# Altium PCB PCB1.PcbDoc (part 1 of 2)
Units mil, origin at the board's own origin, x right, y up, seen from the top; angles counter-clockwise.
Board outline 6000 x 4000 mil, 2 copper layers (Top Layer, Bottom Layer); 64 components, 67 nets, 213 pads, 0 vias.
Unrouted connection lines stored in the file: 121.
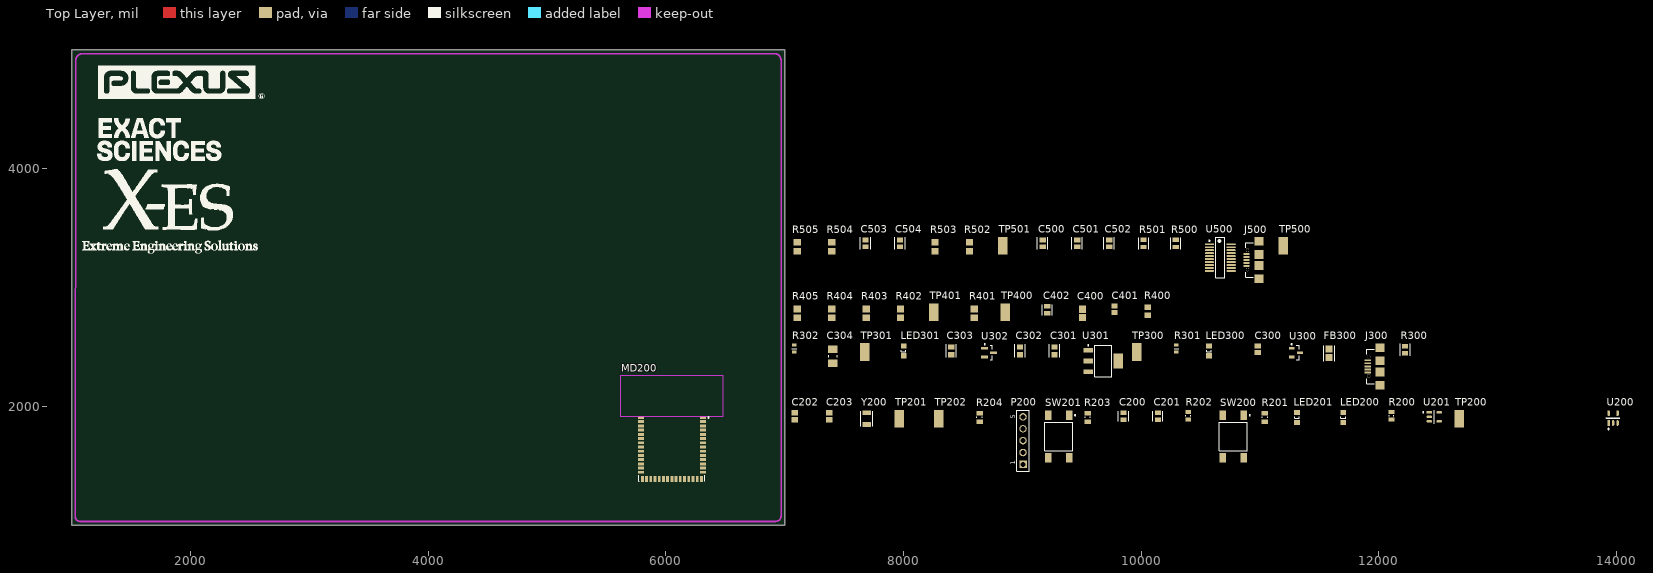
[diagram p0: Top Layer view]
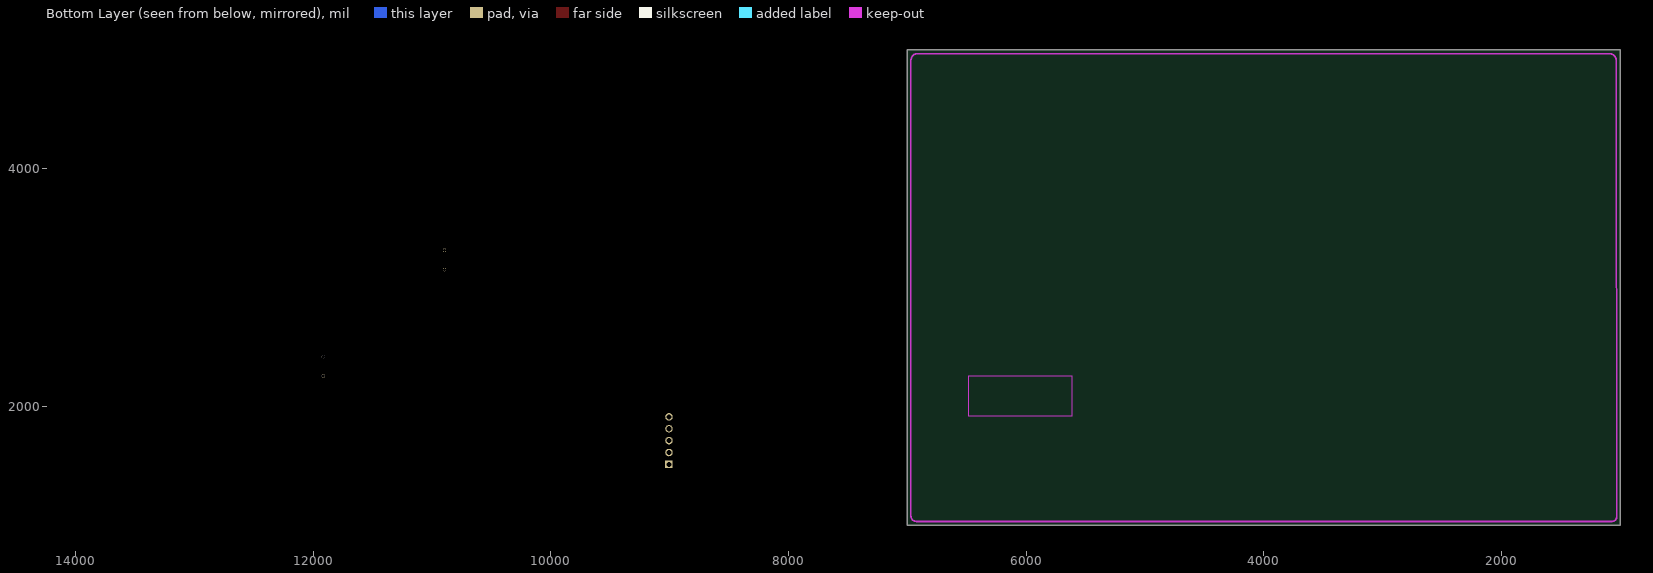
[diagram p1: Bottom Layer view, seen from below]

## Layer stack, top to bottom
Top Solder: solder mask 0.4, Solder Resist, Dk 3.5
Top Layer: signal copper 1.4
Dielectric 1: dielectric 12.6, FR-4, Dk 4.8
Bottom Layer: signal copper 1.4
Bottom Solder: solder mask 0.4, Solder Resist, Dk 3.5

## Board outline
1000,1000 7000,1000 7000,5000 1000,5000

## Design rules (kind name [scope] priority, off if disabled: settings)
Clearance [All] p1: gap=10 ignorepadtopadclearanceinfootprint=FALSE except(0: Arc-Hole Track-Hole SMDPad-Hole THPad-Hole Via-Hole Fill-Hole Poly-Hole Region-Hole Text-Hole)
PolygonConnect [All] p1: connectstyle=Relief reliefconductorwidth=10 reliefentries=4 polygonreliefangle="90 Angle" airgapwidth=10
RoomDefinition 05-UARTBridge [InComponentClass('05-UARTBridge')] p1: confinementstyle=ConfineIn formatcopy=TRUE lockcomponents=FALSE outline 7045,3025 11460,3025 11460,3535 7045,3535
RoomDefinition 04-Accel [InComponentClass('04-Accel')] p2: confinementstyle=ConfineIn formatcopy=TRUE lockcomponents=FALSE outline 7045,2685 10260,2685 10260,2975 7045,2975
RoomDefinition 03-Power [InComponentClass('03-Power')] p3: confinementstyle=ConfineIn formatcopy=TRUE lockcomponents=FALSE outline 7045,2130 12420,2130 12420,2640 7045,2640
RoutingVias [All] p1: holewidth=28 width=50 viastyle="Through Hole" minholewidth=28 minwidth=50 maxholewidth=28 maxwidth=50
SolderMaskExpansion [All] p1: expansion=4 istentingtop=FALSE
Width [All] p1: maxlimit=10 minlimit=10 preferedwidth=10
30 further rules are at their usual default settings.

## Classes and differential pairs
component class 05-UARTBridge: C500 C501 C502 C503 C504 J500 R500 R501 R502 R503 R504 R505 TP500 TP501 U500
component class 04-Accel: C400 C401 C402 C403 D400 R400 R401 R402 R403 R404 R405 TP400 TP401 U400
component class 03-Power: C300 C301 C302 C303 C304 FB300 J300 LED300 LED301 R300 R301 R302 TP300 TP301 U300 U301 U302

## Components (designator, comment, footprint, x,y, rotation, side; value= is the part's Value field where it differs from the comment)
C200 "C0805C106K8PACTU" FP-C0805C-DG-MFG 9850,1915 r90 top value=10uF
C201 "C0805C104K5RACTU" FP-C0805C-DN-MFG 10140,1915 r90 top value="0.10 μF"
C202 "08055A6R0CAT2A" CAPC2013X94X50LL20T25 7085,1915 r90 top
C203 "08055A6R0CAT2A" CAPC2013X94X50LL20T25 7375,1915 r90 top
C300 "0.01uF" CAPC2013X88X50LL20T25 10980,2480 r90 top
C301 "10uF" FP-GRM21B-0_1-IPC_B 9270,2465 r90 top
C302 "10uF" FP-GRM21B-0_1-IPC_B 8980,2465 r90 top
C303 "10uF" FP-GRM21B-0_1-IPC_B 8400,2465 r90 top
C304 "100uF" CAPC3216X190X55ML30T25 7405,2420 r90 top
C400 "2.2uF" CAPC2013X145X50ML20T25 9505,2780 r90 top
C401 "0.1uF" CAPC2013X145X50LL20T25 9775,2815 r90 top
C402 "10uF" FP-C0805C-DN-MFG 9210,2810 r90 top value="10,000 pF"
C500 "0.1uF" FP-CL21-IPC_C 9170,3370 r90 top
C501 "0.1uF" FP-CL21-IPC_C 9460,3370 r90 top
C502 "0.1uF" FP-CL21-IPC_C 9730,3370 r90 top
C503 "0.1uF" FP-CL21-IPC_C 7680,3370 r90 top
C504 "0.1uF" FP-CL21-IPC_C 7970,3370 r90 top
FB300 "BLM21AG121SN1D" FP-BLM21-0_2-t0_85-e0_5-IPC_A 11580,2445 r90 top
J300 "629105136821" 629105136821 12010,2335 r90 top
J500 "629105136821" 629105136821 10990,3230 r90 top
LED200 "150080RS75000" 0805_A 11700,1905 r90 top
LED201 "150080GS75000" 0805_A 11310,1905 r90 top
LED300 "150080GS75000" 0805_A 10570,2465 r90 top
LED301 "150080GS75000" 0805_A 8000,2465 r90 top
MD200 "CYBLE-416045-02" FP-CYBLE-416045-02-MFG 6050.59,1734.92 r0 top
P200 "61300511121" 61300511121 9005,1710 r90 top
R200 "RC0805FR-07330RL" RESC2013X60X35LL10T20 12105,1920 r90 top
R201 "RC0805FR-0710KL" RESC2013X60X35NL10T20 11040,1905 r90 top
R202 "RC0805FR-07330RL" RESC2013X60X35LL10T20 10395,1920 r90 top
R203 "RC0805FR-0710KL" RESC2013X60X35NL10T20 9550,1905 r90 top
R204 "RC0805FR-0710KL" RESC2013X60X35NL10T20 8640,1905 r90 top
R300 "1k" FP-ERA6A-IPC_C 12220,2475 r90 top
R301 "330R" FP-ERA3A-MFG 10295,2485 r90 top
R302 "330R" FP-ERA3A-MFG 7080,2485 r90 top
R400 "110R" RESC2013X60X40NL20T25 10055,2800 r90 top
R401 "100R" RESC2013X60X40ML20T25 8595,2780 r90 top
R402 "100R" RESC2013X60X40ML20T25 7975,2780 r90 top
R403 "100R" RESC2013X60X40ML20T25 7685,2780 r90 top
R404 "100R" RESC2013X60X40ML20T25 7395,2780 r90 top
R405 "100R" RESC2013X60X40ML20T25 7105,2780 r90 top
R500 "27R" FP-CRGCQ0805-IPC_C 10290,3370 r90 top value=27Ω
R501 "27R" FP-CRGCQ0805-IPC_C 10020,3370 r90 top value=27Ω
R502 "100R" RESC2013X60X40ML20T25 8555,3340 r90 top
R503 "100R" RESC2013X60X40ML20T25 8265,3340 r90 top
R504 "100R" RESC2013X60X40ML20T25 7395,3340 r90 top
R505 "100R" RESC2013X60X40ML20T25 7105,3340 r90 top
SW200 "FSM4JSMA" TECO-FSM4JSMA_V 10775,1745 r0 top
SW201 "FSM4JSMA" TECO-FSM4JSMA_V 9305,1745 r0 top
TP200 "5019" KSTN-5019_V 12675,1895 r90 top
TP201 "5019" KSTN-5019_V 7965,1895 r90 top
TP202 "5019" KSTN-5019_V 8295,1895 r90 top
TP300 "5019" KSTN-5019_V 9960,2455 r90 top
TP301 "5019" KSTN-5019_V 7675,2455 r90 top
TP400 "5019" KSTN-5019_V 8855,2790 r90 top
TP401 "5019" KSTN-5019_V 8255,2790 r90 top
TP500 "5019" KSTN-5019_V 11195,3350 r90 top
TP501 "5019" KSTN-5019_V 8835,3350 r90 top
U200 "SN74AHC1G08DBV3" FP-DBV0005A-IPC_C 13970,1900 r90 top
U201 "SN74AHC1G08DBV3" FP-DBV0005A-IPC_C 12465,1910 r0 top
U300 "MCP112T-300E/TT" SOT-23-TT3_L 11300,2450 r0 top
U301 "TLV1117LV33DCYT" DCY0004A_M 9680,2380 r0 top
U302 "MCP809T-450I/TT" SOT-23-TT3_N 8720,2450 r0 top
U500 "FT231XS-U" SSOP-20_L 10665,3250 r0 top
Y200 "32.768KHZ" FP-ABS07-120-MFG 7690,1895 r90 top

## Footprints (in the part's own frame and the unit in brackets; to place one, negate y for a bottom-side part, rotate by r counter-clockwise, add the part's x,y. Pads: shape width x height; smd on the part's side, far side on the other; paste and mask are expansions set on the pad)
0805_A [mm] "Chip LED, 2-Leads, Body 2.0x1.3mm, IPC Medium Density"
  rect 1.1x1.2 smd: 1(-1.05,0) 2(1.05,0)
  silkscreen extent -0.15,-0.5 0.15,0.5, body extent -1,-0.62 1,0.63, height 0.68
61300511121 [mm] "Pin Header, pitch 2.54 mm, THT, Vertical, single row, 5p"
  rect 1.6x1.6 hole 1.1: 1(-5.08,0)
  round 1.6 hole 1.1: 2(-2.54,0) 3(0,0) 4(2.54,0) 5(5.08,0)
  silkscreen extent -6.5,-1.35 6.5,1.35, body extent -6.35,-1.27 6.35,1.27, height 8.57
629105136821 [mm] "Micro USB 2.0 SMT Type B Horizontal 5 Contacts"
  rect 0.4x1.35 smd: 1(-1.3,2.675) 2(-0.65,2.675) 3(0,2.675) 4(0.65,2.675) 5(1.3,2.675)
  round 0.7 hole 0.7 unplated: MH1(-2.075,2.45) MH2(2.075,2.45)
  rect 1.8x1.9 smd: Shell(-4,0) Shell(4,0)
  rect 1.9x1.9 smd: Shell(-1.2,0) Shell(1.2,0)
  silkscreen extent -3.7,1.25 3.7,2.85, body extent -4,-2.73 4,3.17, height 2.69
CAPC2013X88X50LL20T25 [mm] "Chip Capacitor, 2-Leads, Body 2.00x1.25mm, IPC High Density"
  rect 1.1x1.35 smd: 1(-0.7,0) 2(0.7,0)
  body extent -1.1,-0.72 1.1,0.72, height 0.88
CAPC2013X94X50LL20T25 [mm] "Chip Capacitor, 2-Leads, Body 2.01x1.25mm, IPC High Density"
  rect 1.15x1.35 smd: 1(-0.725,0) 2(0.725,0)
  body extent -1.1,-0.72 1.1,0.72, height 0.94
CAPC2013X145X50LL20T25 [mm] "Chip Capacitor, 2-Leads, Body 2.00x1.25mm, IPC High Density"
  rect 1.1x1.35 smd: 1(-0.7,0) 2(0.7,0)
  body extent -1.1,-0.72 1.1,0.72, height 1.45
CAPC2013X145X50ML20T25 [mm] "Chip Capacitor, 2-Leads, Body 2.00x1.25mm, IPC Low Density"
  rect 1.5x1.55 smd: 1(-0.9,0) 2(0.9,0)
  body extent -1.1,-0.72 1.1,0.72, height 1.45
CAPC3216X190X55ML30T25 [mm] "Chip Capacitor, 2-Leads, Body 3.5x1.9mm, IPC Low Density"
  rect 1.65x2 smd: 1(-1.475,0) 2(1.475,0)
  silkscreen extent -0.25,-0.9 0.25,0.9, body extent -1.75,-0.95 1.75,0.95, height 1.9
DCY0004A_M [mm] "SOT223, 4-Leads, Body 6.7x3.7mm, Pitch 2.3mm, IPC Low Density"
  rrect10% 2.05x1 smd: 1(-3.175,2.3) 2(-3.175,0) 3(-3.175,-2.3)
  rrect5% 2.05x3.25 smd: 4(3.175,0)
  silkscreen extent -3.3,-3.35 1.85,3.47, body extent -3.5,-3.25 3.5,3.25, height 1.62
FP-ABS07-120-MFG [mm]
  rect 1x1.8 smd paste+0 mask+0: 1(-1.25,0) 2(1.25,0)
  silkscreen extent -1.6,-1.3 1.6,1.3, body extent -1.85,-1 1.85,1, height 0.25
FP-BLM21-0_2-t0_85-e0_5-IPC_A [mil]
  rect 57.28x61.27 smd paste+0 mask+0: 1(-36.44,0) 2(36.44,0)
  silkscreen extent -65,-46 65,46, body extent -85,-50 85,50, height 10
FP-C0805C-DG-MFG [mm]
  rect 0.95x1.35 smd paste+0 mask+0: 1(-0.75,0) 2(0.75,0)
  silkscreen extent -1.11,-1.08 1.1,1.07, body extent -1.4,-0.85 1.4,0.85, height 0.25
FP-C0805C-DN-MFG [mm]
  rect 0.95x1.35 smd paste+0 mask+0: 1(-0.75,0) 2(0.75,0)
  silkscreen extent -1.1,-1.07 1.1,1.07, body extent -1.4,-0.85 1.4,0.85, height 0.25
FP-CL21-IPC_C [mil]
  rect 41.52x53.39 smd paste+0 mask+0: 1(-28.57,0) 2(28.57,0)
  silkscreen extent -49,-44 49,44, body extent -53,-32 53,32, height 10
FP-CRGCQ0805-IPC_C [mil]
  rect 35.67x51.57 smd paste+0 mask+0: 1(-30.55,0) 2(30.55,0)
  silkscreen extent -48,-43 48,43, body extent -52,-31 52,31, height 10
FP-CYBLE-416045-02-MFG [mm]
  rect 1.27x0.61 smd paste+0 mask+0: 1(6.619,4.32) 2(6.619,3.42) 3(6.619,2.52) 4(6.619,1.62) 5(6.619,0.71) 6(6.619,-0.19) 7(6.619,-1.09) 8(6.619,-1.99) 9(6.619,-2.89) 10(6.619,-3.79) 11(6.619,-4.7) 12(6.619,-5.6) 13(6.619,-6.5) 14(6.619,-7.4) 30(-6.619,-7.4) 31(-6.619,-6.5) 32(-6.619,-5.6) 33(-6.619,-4.7) 34(-6.619,-3.79) 35(-6.619,-2.89) 36(-6.619,-1.99) 37(-6.619,-1.09) 38(-6.619,-0.19) 39(-6.619,0.71) 40(-6.619,1.62) 41(-6.619,2.52) 42(-6.619,3.42) 43(-6.619,4.32)
  rect 0.61x1.27 smd paste+0 mask+0: 15(6.31,-8.869) 16(5.41,-8.869) 17(4.51,-8.869) 18(3.61,-8.869) 19(2.71,-8.869) 20(1.8,-8.869) 21(0.9,-8.869) 22(0,-8.869) 23(-0.9,-8.869) 24(-1.8,-8.869) 25(-2.7,-8.869) 26(-3.61,-8.869) 27(-4.51,-8.869) 28(-5.41,-8.869) 29(-6.31,-8.869)
  Keep-Out Layer region: -11,4.63 11,4.63 11,13.25 -11,13.25
  Keep-Out Layer region: -11,4.63 11,4.63 11,13.25 -11,13.25
  silkscreen extent -7.07,-9.33 7.95,4.43, body extent -11,-9.6 11,13.25, height 0.25
FP-DBV0005A-IPC_C [mm]
  rect 1.205x0.532 smd paste+0 mask+0: 1(-1.05,0.95)
  rrect100% 1.205x0.532 smd paste+0 mask+0: 2(-1.05,0) 3(-1.05,-0.95) 4(1.05,-0.95) 5(1.05,0.95)
  silkscreen extent -2.45,-1.45 0.05,1.45, body extent -1.75,-1.55 1.75,1.55, height 0.25
FP-ERA3A-MFG [mm]
  rect 0.65x0.9 smd paste+0 mask+0: 1(-0.725,0) 2(0.725,0)
  silkscreen extent 0,-0.5 0,0.5, body extent -1.15,-0.6 1.15,0.6, height 0.25
FP-ERA6A-IPC_C [mil]
  rect 39.55x49.69 smd paste+0 mask+0: 1(-29.56,0) 2(29.56,0)
  silkscreen extent -49,-42 49,42, body extent -53,-31 53,31, height 10
FP-GRM21B-0_1-IPC_B [mil]
  rect 45.58x53.63 smd paste+0 mask+0: 1(-32.57,0) 2(32.57,0)
  silkscreen extent -55,-43 55,43, body extent -65,-37 65,37, height 10
KSTN-5019_V [mm] "Test Point, 1-Leads, Body 3.81x2.03mm"
  rect 3.8x2.03 smd: 1(0,0)
  body extent -1.9,-1.01 1.9,1.02, height 2.29
RESC2013X60X35LL10T20 [mm] "Chip Resistor, 2-Leads, Body 2.1x1.35mm, IPC High Density"
  rect 0.8x1.25 smd: 1(-0.8,0) 2(0.8,0)
  silkscreen extent -0.1,-0.53 0.1,0.53, body extent -1.05,-0.67 1.05,0.68, height 0.6
RESC2013X60X35NL10T20 [mm] "Chip Resistor, 2-Leads, Body 2.1x1.35mm, IPC Medium Density"
  rect 1x1.35 smd: 1(-0.9,0) 2(0.9,0)
  silkscreen extent -0.1,-0.58 0.1,0.58, body extent -1.05,-0.68 1.05,0.67, height 0.6
RESC2013X60X40ML20T25 [mm] "Chip Resistor, 2-Leads, Body 2.00x1.25mm, IPC Low Density"
  rect 1.4x1.55 smd: 1(-0.95,0) 2(0.95,0)
  body extent -1.1,-0.72 1.1,0.72, height 0.6
RESC2013X60X40NL20T25 [mm] "Chip Resistor, 2-Leads, Body 2.00x1.25mm, IPC Medium Density"
  rect 1.2x1.45 smd: 1(-0.85,0) 2(0.85,0)
  body extent -1.1,-0.72 1.1,0.72, height 0.6
SOT-23-TT3_L [mm] "SOT23, 3-Leads, Body 2.9x1.3mm, Pitch 0.95mm, Lead Span 2.4mm, IPC High Density"
  rect 1.2x0.6 smd: 1(-0.9,0.95) 2(-0.9,-0.95) 3(0.9,0)
  silkscreen extent -1.02,-1.55 0.7,1.92, body extent -0.7,-1.52 0.7,1.53, height 1.12
SOT-23-TT3_N [mm] "SOT23, 3-Leads, Body 2.9x1.3mm, Pitch 0.95mm, Lead Span 2.4mm, IPC Medium Density"
  rect 1.5x0.6 smd: 1(-0.95,0.95) 2(-0.95,-0.95) 3(0.95,0)
  silkscreen extent -1.07,-1.55 0.7,1.92, body extent -0.7,-1.52 0.7,1.53, height 1.12
SSOP-20_L [mm] "SOP, 20-Leads, Body 8.6x3.9mm, Pitch 0.635mm, IPC High Density"
  oval 1.95x0.4 smd: 1(-2.325,2.857) 2(-2.325,2.222) 3(-2.325,1.587) 4(-2.325,0.953) 5(-2.325,0.318) 6(-2.325,-0.318) 7(-2.325,-0.953) 8(-2.325,-1.587) 9(-2.325,-2.222) 10(-2.325,-2.857) 11(2.325,-2.857) 12(2.325,-2.222) 13(2.325,-1.587) 14(2.325,-0.953) 15(2.325,-0.318) 16(2.325,0.318) 17(2.325,0.953) 18(2.325,1.587) 19(2.325,2.222) 20(2.325,2.857)
  silkscreen extent -2.45,-4.35 1,4.35, body extent -1.99,-4.37 1.99,4.37, height 1.76
TECO-FSM4JSMA_V [mm] "SMD, 4-Leads, Body 6x6mm, Pitch 4.5mm"
  rect 1.4x2.1 smd: 1(2.25,4.55) 2(2.25,-4.55) 3(-2.25,4.55) 4(-2.25,-4.55)
  silkscreen extent -3,-3 3.63,4.67, body extent -3,-5 3,5, height 5.08

## Part data
C200: library part CMP-2007-03243-2, "CAP CER 10UF 10V X5R 0805", 3DS Part Number=220-00001, Capacitance=10uF, Case Code (Imperial)=0805, Case Code (Metric)=2012, Dielectric=X5R, Dielectric Material=Ceramic, Manufacturer=Kemet, Manufacturer 1=KEMET, Max Operating Temperature=85°C, Min Operating Temperature=-55°C, Package=C0805C-DG, Package Quantity=1, Supplier Part Number 1=399-C0805C106K8PAC7800CT-ND, Temperature="-55°C to +85°C", Temperature Coefficient=15%, Temperature Range High=+85°C, Tolerance=10%, Voltage=10V, Automotive=No, Case/Package=0805, Category=Cap, ComponentLink2Description=Datasheet, ComponentLink2URL=https://content.kemet.com/datasheets/KEM_C1006_X5R_SMD.pdf, Construction=Flat, Contact Plating=Tin,Matte, Depth=1.25mm, Device Class L1="Passive Components", Device Class L2=Capacitors, Device Class L3="Ceramic Capacitors", Digikey Description="CAP CER 10UF 10V X5R 0805", Dissipation Factor=10%, Height=1.4mm, Ipc Land Pattern Name=CAPC200125X125, Lead Free=Yes, Length=2mm, Manufacturer Part Number=C0805C106K8PACTU, Manufacturer Part Number 1=C0805C106K8PACTU, Material=Ceramic, Mount="Surface Mount", Mouser Description="CAP CER 10UF 10V X5R 0805", Number of Pins=2, Octopart=https://octopart.com/c0805c106k8pactu-kemet-98697, Packaging="Tape and Reel", Pricing 1="1=0.14000, 10=0.10300, 50=0.05840, 100=0.04830, 500=0.03388, 1000=0.02805 (USD)", Radiation Hardening=No, REACH SVHC="No SVHC", RoHS=TRUE, RoHS Compliant=Yes, Series=C, Stock 1=8631846, Supplier 1=Digi-Key, Temperature Characteristic=X5R, Temperature Range Low=-55°C, Termination=SMD/SMT, Thickness=0.055inch, Voltage Rating=10V, Voltage Rating (DC)=10V, Width=1.2mm
C201: library part CMP-2007-00279-2, "CAP CER 0.1UF 50V X7R 0805", Capacitance="0.10 μF", Case Code (Imperial)=0805, Case Code (Metric)=2012, Dielectric=X7R, Dielectric Material=Ceramic, Manufacturer=KEMET, Max Operating Temperature=125°C, Min Operating Temperature=-55°C, Package=C0805C-DN, Package Quantity=4000, Supplier Part Number 1=399-C0805C104K5RAC7800CT-ND, Temperature="-55°C to +125°C", Temperature Coefficient=30ppm/°C, Temperature Range High=+125°C, Tolerance=0.1, Voltage=500V, Voltage Rating="50 V", Voltage Rating (DC)=50V, Automotive=No, Case/Package=0805, Category=Cap, ComponentLink2Description=Datasheet, ComponentLink2URL=https://content.kemet.com/datasheets/KEM_C1003_C0G_SMD.pdf, Construction=Flat, Contact Plating=Tin,Matte, Depth=1.25mm, Device Class L1="Passive Components", Device Class L2=Capacitors, Device Class L3="Ceramic Capacitors", Digikey Description="CAP CER 0.1UF 50V X7R 0805", Height=0.88mm, Ipc Land Pattern Name=CAPC200125X78, Lead Free=Yes, Lead Pitch=0.75mm, Length=2mm, Manufacturer 1=KEMET, Manufacturer Part Number=C0805C104K5RACTU, Manufacturer Part Number 1=C0805C104K5RACTU, Material=Ceramic, Mount="Surface Mount,PCB", Mouser Description="Cap Ceramic 0.1uF 50V X7R 10% SMD 2.0 x 1.2 mm 125 C Paper T/R", Number of Pins=2, Octopart=https://octopart.com/c0805c104k5ractu-kemet-143926, Packaging="Tape and Reel", Pricing 1="1=0.14000, 10=0.09700, 50=0.05480, 100=0.04540, 500=0.03182, 1000=0.02634 (USD)", Radiation Hardening=No, REACH SVHC="No SVHC", RoHS=TRUE, RoHS Compliant=Yes, Series=C0805C, Stock 1=2903712, Supplier 1=Digi-Key, Temperature Characteristic=X7R, Temperature Range Low=-55°C, Termination=SMD/SMT, Thickness=0.035inch, Width=1.2mm
C202 C203: library part CMP-2007-04344-1, Capacitance=6pF, Case Code (Imperial)=0805, Case Code (Metric)=2012, Dielectric=C0G, Manufacturer="AVX Interconnect / Elco", Manufacturer 1="Kyocera AVX", Max Operating Temperature=125°C, Min Operating Temperature=-55°C, Package Quantity=4000, Supplier Part Number 1=478-11894-1-ND, Voltage Rating=50V, Case/Package=0805, Category="Ceramic Capacitors", ComponentLink1Description=https://datasheet.ciiva.com/205/ccog-205395.pdf?src-supplier=Digi-Key, ComponentLink1URL=https://datasheet.ciiva.com/205/ccog-205395.pdf?src-supplier=Digi-Key, ComponentLink2Description=https://datasheet.ciiva.com/11499/ccog-11499893.pdf?src-supplier=Avnet, ComponentLink2URL=https://datasheet.ciiva.com/11499/ccog-11499893.pdf?src-supplier=Avnet, ComponentLink3Description=https://datasheet.ciiva.com/5424/ccog-5424575.pdf?src-supplier=Mouser, ComponentLink3URL=https://datasheet.ciiva.com/5424/ccog-5424575.pdf?src-supplier=Mouser, Construction=Flat, Depth=1.25mm, Length=2.01mm, Manufacturer Part Number 1=08055A6R0CAT2A, Mount="Surface Mount", Packaging="Tape and Reel", Part Number=08055A6R0CAT2A, Pricing 1="1=0.24000, 10=0.16700, 50=0.10000, 100=0.08440, 500=0.05778, 1000=0.05111 (USD)", Radiation Hardening=No, RoHS=Yes, RoHS Compliant=Yes, Series=-, Stock 1=19844, Supplier 1=Digi-Key, Termination=SMD/SMT, Thickness=0.037inch, Voltage Rating (DC)=50V, Width=0.049inch
C300: library part CMP-2007-00266-1, Capacitance=10nF, Case Code (Imperial)=0805, Case Code (Metric)=2012, Dielectric=X7R, Manufacturer=Kemet, Manufacturer Part Number=C0805C103K5RACTU, Max Operating Temperature=125°C, Min Operating Temperature=-55°C, Package Quantity=4000, Tolerance=10%, Voltage=50V, Case/Package=0805, Category="Ceramic Capacitors", ComponentLink1Description=http://www.farnell.com/datasheets/2740682.pdf?src-supplier=Farnell, ComponentLink1URL=http://www.farnell.com/datasheets/2740682.pdf?src-supplier=Farnell, ComponentLink2Description=http://www.onlinecomponents.com/productFiles/mf-KEM/kem_c1002_x7r_smd.pdf?src-supplier=Onlinecomponents.com, ComponentLink2URL=http://www.onlinecomponents.com/productFiles/mf-KEM/kem_c1002_x7r_smd.pdf?src-supplier=Onlinecomponents.com, ComponentLink3Description=https://www.verical.com/server-webapp/html/getDatasheet?partID=293414&src-supplier=Verical, ComponentLink3URL=https://www.verical.com/server-webapp/html/getDatasheet?partID=293414&src-supplier=Verical, ComponentLink4Description=http://www.farnell.com/datasheets/2740682.pdf?src-supplier=Newark, ComponentLink4URL=http://www.farnell.com/datasheets/2740682.pdf?src-supplier=Newark, ComponentLink5Description=http://www.farnell.com/datasheets/2740682.pdf?src-supplier=Element14, ComponentLink5URL=http://www.farnell.com/datasheets/2740682.pdf?src-supplier=Element14, ComponentLink6Description=https://api.kemet.com/component-edge/download/datasheet/C0805C103K5RACTU.pdf?src-supplier=Digi-Key, ComponentLink6URL=https://api.kemet.com/component-edge/download/datasheet/C0805C103K5RACTU.pdf?src-supplier=Digi-Key, ComponentLink7Description=http://www.kemet.com/Lists/ProductCatalog/Attachments/53/KEM_C1002_X7R_SMD.pdf?src-supplier=Avnet, ComponentLink7URL=http://www.kemet.com/Lists/ProductCatalog/Attachments/53/KEM_C1002_X7R_SMD.pdf?src-supplier=Avnet, Construction=Flat, Contact Plating=Tin,Matte, Depth=1.25mm, Height=0.78mm, Lead Pitch=0.75mm, Length=2mm, Mount="Surface Mount", Packaging="Tape and Reel", Part Number=C0805C103K5RACTU, Pricing 2="1=0.11000, 10=0.07500, 50=0.04260, 100=0.03530, 500=0.02476, 1000=0.02050 (USD)", Radiation Hardening=No, RoHS=Yes, Stock 2=3220156, Supplier 1=Digi-Key, Supplier 2=Digi-Key, Termination=SMD/SMT, Voltage Rating=50V, Voltage Rating (DC)=50V, Width=1.2mm
C301 C302 C303: library part CMP-2007-03503-2, "Chip Multilayer Ceramic Capacitors for General Purpose, 0805, 10uF, X6S, 22%, 10%, 16V", Case Code (Imperial)=0805, Case Code (Metric)=2012, Dielectric=X6S, Max Operating Temperature=105°C, Min Operating Temperature=-55°C, Package Quantity=3000, Tolerance=10%, Voltage=16V, Capacitance=10uF, Case/Package=0805, Depth=1.25mm, Height=1.25mm, Lead Free="Lead Free", Length=2mm, Mount="Surface Mount", Packaging="Tape and Reel", REACH SVHC="No SVHC", Termination=SMD/SMT, Thickness=0.053inch, Voltage Rating=16V, Voltage Rating (DC)=16V, Weight=0.000335oz, Width=0.049inch
C304: library part CMP-1662-00011-2, "Chip Capacitor, 100 uF, +/- 20%, 6.3 V, -55 to 85 degC, 1206 (3216 Metric), RoHS, Tape and Reel", Capacitance="100 uF", Case Code (Imperial)=1206, Case Code (Metric)=3216, Max Operating Temperature="85 degC", Min Operating Temperature="-55 degC", Package Quantity=2000, PartNumber=GRM31CR60J107ME39L, Tolerance=20%, Type (Capacitors)=X5R, Voltage Rating="6.3 V", Case\/Package=1206, ComponentLink1Description="Manufacturer URL", ComponentLink1URL=http://www.murata.com/, ComponentLink2Description=Datasheet, ComponentLink2URL=http://psearch.en.murata.com/capacitor/product/GRM31CR60J107ME39%23.pdf, DatasheetVersion=09/2016, Height="1.6 mm", Length="3.2 mm", Mount="Surface Mount", Mounting Technology="Surface Mount", PackageDescription="2-Pin Surface Mount Device, Body 3.2 x 1.6 mm", PackageReference=1206, Packaging="Tape and Reel", Pins=2, Radiation Hardening=No, REACH SVHC="No SVHC", RoHSCompliant=true, Voltage Rating (DC)="6.3 V", Width="1.6 mm"
C400: library part CMP-1036-04819-2, Manufacturer=Kemet, Part Number=C0805C225K9PACTU
C401: library part CMP-1036-04391-2, Manufacturer=Kemet, Part Number=C0805C104K9RACTU
C402: library part CMP-1036-03808-3, "CAP CER 10000PF 10V X7R 0805", Capacitance="10,000 pF", Manufacturer=KEMET, Manufacturer Part Number=C0805C103K8RACTU, Package=C0805C-DN, Temperature="-55°C to +125°C", Temperature Characteristic=X7R, Temperature Coefficient=30ppm/°C, Temperature Range High=+125°C, Temperature Range Low=-55°C, Tolerance=0.1, Voltage Rating="10 V", Automotive=No, Category=Cap, ComponentLink2Description=Datasheet, ComponentLink2URL=https://content.kemet.com/datasheets/KEM_C1003_C0G_SMD.pdf, Device Class L1="Passive Components", Device Class L2=Capacitors, Device Class L3="Ceramic Capacitors", Digikey Description="CAP CER 10000PF 10V X7R 0805", Height=0.88mm, Ipc Land Pattern Name=CAPC200125X78, Lead Free=Yes, Material=Ceramic, Mouser Description="Multilayer Ceramic Capacitors MLCC - SMD/SMT 10volts 10000pF X7R 10%", Octopart=https://octopart.com/c0805c103k8ractu-kemet-12595572, RoHS=TRUE
C500 C501 C502 C503 C504: library part CMP-2000-05017-2, "CL21 Series 0805 100nF 50V ±10% Tolerance X7R Multilayer Ceramic Chip Capacitor", Capacitance=100nF, Case Code (Imperial)=0805, Case Code (Metric)=2012, Dielectric=X7R, Max Operating Temperature=125°C, Min Operating Temperature=-55°C, Tolerance=10%, Voltage=50V, Case/Package=0805, Contact Plating=Tin, Depth=1.25mm, Height=0.85mm, Lead Free="Lead Free", Length=2mm, Material=Ceramic, Mount="Surface Mount", Packaging="Tape and Reel", Radiation Hardening=No, Thickness=0.037inch, Voltage Rating=50V, Voltage Rating (DC)=50V, Width=0.049inch
FB300: library part CMP-0686-00716-3, "FERRITE BEAD 120 OHM 0805 1LN", Case Code (Imperial)=0805, Case Code (Metric)=2012, Current Rating=800mA, DC Current=200mA, DC Resistance (DCR)=100mR, Frequency=100MHz, Max Current Rating=1A, Max Operating Temperature=125°C, Min Operating Temperature=-55°C, Package Quantity=1, Resistance=150mR, Tolerance=25%, Case/Package=0805, Core Material=Ferrite, DC Resistance-Max=100mR, Depth=1.25mm, Height=0.85mm, Impedance=120R, Lead Free="Lead Free", Length=2mm, Material=Steel, Max DC Current=200mA, Military Standard=Not, Number of Circuits=1, Number of Lines=1, Number of Pins=2, Packaging="Tape and Reel", Radiation Hardening=No, REACH SVHC="No SVHC", Series=BLM21A, Shielding=Unshielded, Termination=SMD/SMT, Test Frequency=100MHz, Width=1.25mm
J300 J500: library part CMP-1502-03253-1, "Micro USB 2.0 Type B Receptacle WR-COM, Horizontal, SMT, with Pads and Pegs", Contact Resistance=30mOhm, Manufacturer="Wurth Elektronik", Operating Temperature=-40to105degC, Rated Current=1A, Working Voltage=30VAC, Connector Type=MicroUSB2.0TypeB, Datasheet URL=https://katalog.we-online.de/em/datasheet/629105136821.pdf, Gender=Receptacle, Manufacturer URL=http://www.we-online.de, Mounting Technology=SMT, Orientation=Horizontal, Package Reference=629105136821, Packaging=TapeandReel, Part Number=629105136821, Publisher=WurthElektronik
LED200: library part CMP-1426-00011-1, "SMD mono-color Chip LED, WL-SMCW, Red", Case Code (Imperial)=0805, Case Code (Metric)=2012, Color=Red, Forward Current=30mA, Forward Voltage=2V, Manufacturer="Wuerth Elektronik", Manufacturer 1="Wurth Electronics", Max Operating Temperature=85°C, Min Operating Temperature=-40°C, Package Quantity=4000, Supplier Part Number 1=732-4984-1-ND, Test Current=20mA, Case/Package=0805, Category=LEDs, ComponentLink1Description="Manufacturer URL", ComponentLink1URL=http://www.we-online.com, ComponentLink2Description=Datasheet, ComponentLink2URL=http://katalog.we-online.com/led/datasheet/150080RS75000.pdf, ComponentLink3Description=https://datasheet.ciiva.com/22656/150080rs75000-22656961.pdf?src-supplier=Element14, ComponentLink3URL=https://datasheet.ciiva.com/22656/150080rs75000-22656961.pdf?src-supplier=Element14, ComponentLink4Description=https://datasheet.ciiva.com/29279/759435-da-01-en-chipled-0805-w-kl-rot-150080rs75000-29279032.pdf?src-supplier=Conrad, ComponentLink4URL=https://datasheet.ciiva.com/29279/759435-da-01-en-chipled-0805-w-kl-rot-150080rs75000-29279032.pdf?src-supplier=Conrad, Dominant Wavelength=625nm, Height=0.7mm, Length=2mm, Lens Style=Clear,Rectangular, Luminous Intensity=150mcd, Manufacturer Part Number 1=150080RS75000, Mount="Surface Mount", PackageReference=0805_A, Packaging="Tape and Reel", PartNumber=150080RS75000, Pricing 1="1=0.19000, 50=0.17600, 100=0.15100, 500=0.13100 (USD)", REACH SVHC=Unknown, RoHS=Yes, RoHS Compliant=Yes, Stock 1=100282, Supplier 1=Digi-Key, Viewing Angle=140°, Wavelength=625nm, Width=1.25mm
LED201: library part CMP-1426-00007-1, "SMD mono-color Chip LED, WL-SMCW, Green", Case Code (Imperial)=0805, Case Code (Metric)=2012, Color=Green, Forward Current=30mA, Forward Voltage=3.2V, Manufacturer="Wuerth Elektronik", Manufacturer 1="Wurth Electronics", Max Operating Temperature=85°C, Min Operating Temperature=-40°C, Package Quantity=4000, Supplier Part Number 1=732-4983-1-ND, Test Current=20mA, Case/Package=0805, Category=LEDs, ComponentLink1Description="Manufacturer URL", ComponentLink1URL=http://www.we-online.com, ComponentLink2Description=Datasheet, ComponentLink2URL=http://katalog.we-online.com/led/datasheet/150080GS75000.pdf, ComponentLink3Description=https://datasheet.ciiva.com/29563/150080gs75000-29563008.pdf?src-supplier=Digi-Key, ComponentLink3URL=https://datasheet.ciiva.com/29563/150080gs75000-29563008.pdf?src-supplier=Digi-Key, ComponentLink4Description=https://datasheet.ciiva.com/29279/759434-da-01-en-chipled-0805-w-kl-gruen-150080gs75000-29279039.pdf?src-supplier=Conrad, ComponentLink4URL=https://datasheet.ciiva.com/29279/759434-da-01-en-chipled-0805-w-kl-gruen-150080gs75000-29279039.pdf?src-supplier=Conrad, Dominant Wavelength=520nm, Height=0.7mm, Length=2mm, Lens Style=Clear,Rectangular, Luminous Intensity=450mcd, Manufacturer Part Number 1=150080GS75000, Mount="Surface Mount", PackageReference=0805_A, Packaging="Cut Tape", PartNumber=150080GS75000, Pricing 1="1=0.19000, 50=0.17600, 100=0.15100, 500=0.13100 (USD)", REACH SVHC=Unknown, RoHS=Yes, RoHS Compliant=Yes, Stock 1=95801, Supplier 1=Digi-Key, Viewing Angle=140°, Wavelength=520nm, Width=1.25mm
LED300 LED301: library part CMP-1426-00007-1, "SMD mono-color Chip LED, WL-SMCW, Green", Color=Green, Manufacturer="Wuerth Elektronik", ComponentLink1Description="Manufacturer URL", ComponentLink1URL=http://www.we-online.com, ComponentLink2Description=Datasheet, ComponentLink2URL=http://katalog.we-online.com/led/datasheet/150080GS75000.pdf, PackageReference=0805_A, PartNumber=150080GS75000
MD200: library part CMP-12964-000002-1, "RF TXRX MOD BLUETOOTH TRACE ANT", Manufacturer="Cypress Semiconductor", Manufacturer 1=Cypress, Max Frequency=2.5GHz, Max Supply Voltage=3.6V, Min Supply Voltage=1.71V, Package=0, Receiving Current=6.7mA, Supplier Part Number 1=428-4622-1-ND, Temperature="-40°C to +85°C", Temperature Range High=+85°C, Temperature Range Low=-40°C, Transmitting Current=5.7mA, Automotive=No, Bandwidth=100MHz, Category=UNK, ComponentLink2Description=Datasheet, ComponentLink2URL=https://www.cypress.com/file/428336/download, Data Rate=2Mbits/s, Device Class L1="Integrated Circuits (ICs)", Device Class L2="RF Semiconductors and Devices", Device Class L3=Transceivers, Digikey Description="RF TXRX MOD BLUETOOTH TRACE ANT", Height=2mm, Interface=I2C,SPI,UART,I2S,Other, Lead Free=Yes, Manufacturer Part Number=CYBLE-416045-02, Manufacturer Part Number 1=CYBLE-416045-02, Number Of Adc Channels=1, Number Of Gpio=36, Octopart=https://octopart.com/cyble-416045-02-cypress+semiconductor-96386825, Pricing 1="1=16.24000, 10=14.69300, 25=13.53280, 100=12.37280, 250=11.59952 (USD)", RoHS=TRUE, RoHS Compliant=Yes, Stock 1=3441, Supplier 1=Digi-Key
P200: library part CMP-1502-01068-1, "THT Vertical Pin Header WR-PHD, Pitch 2.54 mm, Single Row, 5 pins", Color=Black, Contact Resistance=20mOhm, Manufacturer="Wurth Elektronik", Manufacturer 1="Wurth Electronics", Operating Temperature=-40to105degC, Rated Current=3A, Supplier Part Number 1=732-5318-ND, Withstanding Voltage=500VAC, Working Voltage=250VAC, Category="Headers and Wire Housings", ComponentLink1Description=http://www.farnell.com/cad/1737268.pdf?src-supplier=Element14, ComponentLink1URL=http://www.farnell.com/cad/1737268.pdf?src-supplier=Element14, ComponentLink2Description=https://katalog.we-online.de/em/datasheet/6130xx11121.pdf?src-supplier=Digi-Key, ComponentLink2URL=https://katalog.we-online.de/em/datasheet/6130xx11121.pdf?src-supplier=Digi-Key, Connector Type="Male Pin", Contact Material=Copper, Contact Mating Length=0.236inch, Contact Plating=Gold, Datasheet URL=https://katalog.we-online.de/em/datasheet/6130xx11121.pdf, Gender=Male, Lead Free="Lead Free", Manufacturer Part Number 1=61300511121, Manufacturer URL=http://www.we-online.de, Mount="Through Hole", Mounting Technology=THT, Number of Contacts=5, Number of Positions=5, Number of Rows=1, Orientation=Vertical, Package Reference=61300511121, Packaging=Bag, Part Number=61300511121, Pin Number=5, Pitch=2.54mm, Pricing 1="1=0.26000, 10=0.22200, 25=0.18520, 50=0.15500, 100=0.14100, 1000=0.12800 (USD)", Publisher=WurthElektronik, REACH SVHC=Unknown, RoHS=Yes, RoHS Compliant=Yes, Row Number=Single, Stock 1=41302, Supplier 1=Digi-Key, Termination=Solder
R200 R202: library part CMP-2000-06960-1, "Chip Resistor, 330 Ohm, +/- 1%, 125 mW, -55 to 155 degC, 0805 (2012 Metric), RoHS, Tape and Reel", Case Code (Imperial)=0805, Case Code (Metric)=2012, Manufacturer=Yageo, Max Operating Temperature=155°C, Max Power Dissipation=125mW, Min Operating Temperature=-55°C, Operating Temperature Range=-55Cto+155C, Package Description="2-Pin Surface Mounted Device, Body 2 x 1.25 mm", Package Quantity=5000, Power Rating=125mW(1/8W), Resistance=330Ohms, Resistance Tolerance=1%, Resistor Type="Thick Film", Supplier Part Number 1=311-330CRCT-ND, Temperature Coefficient=100PPM/C, Voltage Rating=150V, Case Code - in=0805, Case Code - mm=2012, Case/Package=0805, Category="Chip SMD Resistors", ComponentLink1Description=https://datasheet.ciiva.com/2457/pyu-r-int-thick-7-2457015.pdf?src-supplier=Digi-Key, ComponentLink1URL=https://datasheet.ciiva.com/2457/pyu-r-int-thick-7-2457015.pdf?src-supplier=Digi-Key, ComponentLink2Description=https://datasheet.ciiva.com/2457/pyu-r-int-thick-7-2457016.pdf?src-supplier=Digi-Key, ComponentLink2URL=https://datasheet.ciiva.com/2457/pyu-r-int-thick-7-2457016.pdf?src-supplier=Digi-Key, ComponentLink3Description=https://datasheet.ciiva.com/2457/pyu-r-int-thick-7-2457014.pdf?src-supplier=Digi-Key, ComponentLink3URL=https://datasheet.ciiva.com/2457/pyu-r-int-thick-7-2457014.pdf?src-supplier=Digi-Key, ComponentLink4Description=https://datasheet.ciiva.com/12667/rc0805-12667925.pdf?src-supplier=Mouser, ComponentLink4URL=https://datasheet.ciiva.com/12667/rc0805-12667925.pdf?src-supplier=Mouser, ComponentLink5Description=https://datasheet.ciiva.com/7941/444164-7941768.pdf?src-supplier=Element14, ComponentLink5URL=https://datasheet.ciiva.com/7941/444164-7941768.pdf?src-supplier=Element14, ComponentLink6Description=https://datasheet.ciiva.com/7941/444164-7941769.pdf?src-supplier=Element14, ComponentLink6URL=https://datasheet.ciiva.com/7941/444164-7941769.pdf?src-supplier=Element14, ComponentLink7Description=https://datasheet.ciiva.com/16740/rc0805-16740975.pdf?src-supplier=Future+Electronics, ComponentLink7URL=https://datasheet.ciiva.com/16740/rc0805-16740975.pdf?src-supplier=Future+Electronics, Construction=Rectangular, Datasheet URL=http://www.yageo.com/documents/recent/PYu-RC_Group_51_RoHS_L_7.pdf, Datasheet Version="Rev. 7, 05/2017", Depth=1.25mm, Features="Moisture Resistant", Height=0.024inch, Lead Free="Lead Free", Length=2mm, Manufacturer 1=Yageo, Manufacturer Part Number 1=RC0805FR-07330RL, Manufacturer URL=http://www.yageo.com/, Military Standard=Not, Mounting Technology=SurfaceMount, Number of Terminations=2, Package Reference=0805, Packaging=Reel, Pricing 1="1=0.10000, 10=0.03800, 100=0.01560, 1000=0.00699, 2500=0.00607 (USD)", Product=ThickFilmResistorsGeneralPurpose, REACH SVHC=Unknown, RoHS=Yes, RoHS Compliant=Yes, Series=RC, Size Code=0805, Stock 1=1406392, Supplier 1=Digi-Key, Termination=SMD/SMT, Termination Style=SMD/SMT, Tolerance=1%, Width=0.049inch
R201 R203 R204: library part CMP-1659-00013-4, "Chip Resistor, 10 KOhm, +/- 1%, 0.125 W, -55 to 155 degC, 0805 (2012 Metric), RoHS, Tape and Reel", Case Code (Imperial)=0805, Case Code (Metric)=2012, Manufacturer=Yageo, Max Operating Temperature="155 degC", Max Power Dissipation=125mW, Min Operating Temperature="-55 degC", Package Quantity=5000, Resistance=10kR, Resistance Tolerance=1%, Resistor Type="Thick Film", Supplier Part Number 1=311-10.0KCRCT-ND, Temperature Coefficient=100ppm/°C, Voltage Rating="150 V", Case/Package=0805, Category="Chip SMD Resistors", ComponentLink1Description="Manufacturer URL", ComponentLink1URL=http://www.yageo.com/, ComponentLink2Description=Datasheet, ComponentLink2URL=http://www.yageo.com/documents/recent/PYu-RC_Group_51_RoHS_L_04.pdf, ComponentLink3Description=https://datasheet.ciiva.com/11808/0900766b8106beab-11808151.pdf?src-supplier=RSComponents, ComponentLink3URL=https://datasheet.ciiva.com/11808/0900766b8106beab-11808151.pdf?src-supplier=RSComponents, ComponentLink4Description=https://datasheet.ciiva.com/46447/444164-46447563.pdf?src-supplier=Element14, ComponentLink4URL=https://datasheet.ciiva.com/46447/444164-46447563.pdf?src-supplier=Element14, ComponentLink5Description=https://datasheet.ciiva.com/2456/pyu-r-int-thick-7-2456973.pdf?src-supplier=Digi-Key, ComponentLink5URL=https://datasheet.ciiva.com/2456/pyu-r-int-thick-7-2456973.pdf?src-supplier=Digi-Key, ComponentLink6Description=https://datasheet.ciiva.com/2456/pyu-r-int-thick-7-2456974.pdf?src-supplier=Digi-Key, ComponentLink6URL=https://datasheet.ciiva.com/2456/pyu-r-int-thick-7-2456974.pdf?src-supplier=Digi-Key, ComponentLink7Description=https://datasheet.ciiva.com/2456/pyu-r-int-thick-7-2456972.pdf?src-supplier=Digi-Key, ComponentLink7URL=https://datasheet.ciiva.com/2456/pyu-r-int-thick-7-2456972.pdf?src-supplier=Digi-Key, ComponentLink8Description=https://datasheet.ciiva.com/12669/rc0805-12669688.pdf?src-supplier=Mouser, ComponentLink8URL=https://datasheet.ciiva.com/12669/rc0805-12669688.pdf?src-supplier=Mouser, ComponentLink9Description=https://datasheet.ciiva.com/16747/rc0805-16747087.pdf?src-supplier=Future+Electronics, ComponentLink9URL=https://datasheet.ciiva.com/16747/rc0805-16747087.pdf?src-supplier=Future+Electronics, Construction=Rectangular, DatasheetVersion="Rev. 4, 02/2016", Depth=1.25mm, Features="Moisture Resistant", Height="0.5 mm", Lead Free="Lead Free", Length="2 mm", Manufacturer 1=Yageo, Manufacturer Part Number 1=RC0805FR-0710KL, Military Standard=Not, Mount="Surface Mount", Mounting Technology="Surface Mount", Number of Terminations=2, PackageDescription="2-Pin Surface Mounted Device, Body 2 x 1.25 mm", PackageReference=0805, Packaging="Tape and Reel", Pins=2, Power Rating=125mW, Pricing 1="1=0.10000, 10=0.03800, 100=0.01560, 1000=0.00702, 2500=0.00610 (USD)", REACH SVHC="No SVHC", RoHS=Yes, RoHS Compliant=Yes, RoHSCompliant=true, Series=RC, Size Code=0805, Stock 1=5682818, Supplier 1=Digi-Key, Technology="THICK FILM", Termination=SMD/SMT, Tolerance=1%, Width=0.049inch
R300: library part CMP-2001-00581-2, "RES 1K OHM 0.1% 1/8W 0805", Case Code (Imperial)=0805, Case Code (Metric)=2012, Max Operating Temperature=155°C, Max Power Dissipation=125mW, Min Operating Temperature=-55°C, Package Quantity=5000, Resistance=1kR, Resistance Tolerance=0.1%, Resistor Type="Thin Film", Temperature Coefficient=25ppm/°C, Voltage Rating=100V, Case/Package=0805, Construction=Rectangular, Contact Plating=Tin, Depth=1.25mm, Height=0.5mm, Length=2mm, Military Standard=Not, Mount="Surface Mount", Number of Pins=2, Number of Terminations=2, Packaging="Tape and Reel", Power Rating=125mW, Radiation Hardening=No, REACH SVHC="No SVHC", RoHS Compliant=Yes, Series=ERA-6A, Technology="THIN FILM", Termination=SMD/SMT, Tolerance=0.1%, Width=1.25mm, Working Voltage=100V
R301 R302: library part CMP-2000-00036-2, "RES SMD 330 OHM 0.1% 1/10W 0603", Case Code (Imperial)=0603, Case Code (Metric)=1608, Max Operating Temperature=155°C, Max Power Dissipation=100mW, Min Operating Temperature=-55°C, Package Quantity=1, Resistance Tolerance=0.1%, Resistor Type="Thin Film", Temperature Coefficient=25ppm/°C, Voltage Rating=75V, Case/Package=0603, Construction=Rectangular, Contact Plating=Tin, Depth=0.8mm, Features="Automotive AEC-Q200", Height=0.45mm, Length=1.6mm, Military Standard=Not, Mount="Surface Mount", Number of Pins=2, Number of Terminations=2, Packaging="Tape and Reel", Power Rating=100mW, Radiation Hardening=No, Reach SVHC Compliant=Yes, Resistance=330R, RoHS Compliant=Yes, Series=ERA-3A, Size Code=0603, Technology="METAL FILM", Termination=SMD/SMT, Tolerance=0.1%, Width=0.8mm
R400: library part CMP-2001-00585-1, Manufacturer=Panasonic, Part Number=ERA6AEB111V
R401 R402 R403 R404 R405 R502 R503 R504 R505: library part CMP-2001-00580-1, Manufacturer=Panasonic, Part Number=ERA6AEB101V
R500 R501: library part CMP-03211-007904-1, "CRGCQ0805 27Ω 0.125W ±200ppm/°C 1% 150V", Ambient Temperature Range High=+70°C, Manufacturer="TE Connectivity", Manufacturer Part Number=CRGCQ0805F27R, Package=CRGCQ0805, Power Rating=0.125W, Resistance=27Ω, Temperature="-55°C to +155°C", Temperature Coefficient=±200ppm/°C, Temperature Range High=+155°C, Temperature Range Low=-55°C, Tolerance=0.01, Voltage Rating=150V, Automotive=Yes, Automotive Grade="Grade 323", Category=Res, ComponentLink2Description=Datasheet, ComponentLink2URL=https://www.te.com/commerce/DocumentDelivery/DDEController?Action=showdoc&DocId=Data+Sheet%7F1773204-3%7F1%7Fpdf%7FEnglish%7FENG_DS_1773204-3_1.pdf%7F4-2176341-332, Composition="Thick Film", Device Class L1="Passive Components", Device Class L2=Resistors, Device Class L3="Chip SMD Resistors", Height=0.65mm, Ipc Land Pattern Name=RESC200125X55, Lead Free=Yes, Mouser Description="Res General Purpose Thick Film 0805 27 Ohm 1% 1/8W ±200ppm/°C Molded Paper T/R", Octopart=https://octopart.com/crgcq0805f27r-te+connectivity-91018166, RoHS=TRUE, Series=CRGCQ
SW200 SW201: library part CMP-2000-05602-2, "Swicth, SPST, 24 V, -35 to 85 degC, 4-Pin SMD, RoHS, Tape and Reel", Case/Package=SMD/SMT, Color=Black, Contact Current Rating=50mA, Contact Resistance=100mOhm, Insulation Resistance=100MR, Manufacturer="TE Connectivity", Max Operating Temperature=85degC, Max Voltage Rating (DC)=12V, Min Operating Temperature=-35degC, Operating Force=1.57N, Package Description="4-Pin Surface Mount Device, Body 6 x 6 mm, Pitch 4.5 mm", Package Quantity=750, Supplier Part Number 1=450-1129-ND, Voltage Rating=24V, Actuator Length=0.055inch, Actuator Material=Polyamide, Actuator Type=Standard, Case\/Package=SMD/SMT, Category="Pushbutton Switches", Contact Material=CopperAlloy, Contact Plating=Silver, Current Rating=50mA, Datasheet URL=http://www.te.com/commerce/DocumentDelivery/DDEController?Action=showdoc&DocId=Customer+Drawing%7F2-1437565-7%7FV%7Fpdf%7FEnglish%7FENG_CD_2-1437565-7_V.pdf%7F4-1437565-2, Datasheet Version="Rev. V, 02/2015", Depth=10mm, Electrical Life=100000Cycles, ELV=Compliant, Illumination Type=Illuminated, Lead Free="Lead Free", Length=6mm, Manufacturer 1="TE Connectivity", Manufacturer Part Number 1=FSM4JSMA, Manufacturer URL=http://www.te.com/, Max Current Rating=50mA, Mechanical Life=100000Cycles, Mount=SurfaceMount, Mounting Technology=SurfaceMount, Orientation=Straight, Package Reference=FSM4JSMA, Packaging=LoosePiece, Pricing 1="1=0.27000, 10=0.26300, 25=0.24960, 100=0.22600, 250=0.20604, 750=0.19152, 1500=0.16339, 3000=0.15885, 5250=0.14977 (USD)", Radiation Hardening=No, REACH SVHC=Unknown, RoHS=Yes, RoHS Compliant=Yes, RoHSCompliant=true, Series=FSMJSMA, Stock 1=65608, Supplier 1=Digi-Key, Switch Function=Off-Mom, Switch Travel=0.25mm, Termination=GullWing, Throw Configuration=SPST, Voltage Rating (DC)=24V, Width=6mm
TP200 TP201 TP202 TP300 TP301 TP400 TP401 TP500 TP501: library part CMP-1672-00008-1, "Test Point, 1 Position SMD, RoHS, Tape and Reel", Manufacturer 1="Keystone Electronics", Package Quantity=1000, Supplier Part Number 1=36-5019CT-ND, Category=Connectors, ComponentLink1Description="Manufacturer URL", ComponentLink1URL=http://www.keyelco.com/, ComponentLink2Description=Datasheet, ComponentLink2URL=http://www.keyelco.com/product-pdf.cfm?p=1357, ComponentLink3Description=https://datasheet.ciiva.com/16318/m60-2p61-16318395.pdf?src-supplier=Future+Electronics, ComponentLink3URL=https://datasheet.ciiva.com/16318/m60-2p61-16318395.pdf?src-supplier=Future+Electronics, ComponentLink4Description=https://datasheet.ciiva.com/16885/70182998-16885945.pdf?src-supplier=Allied+Electronics, ComponentLink4URL=https://datasheet.ciiva.com/16885/70182998-16885945.pdf?src-supplier=Allied+Electronics, ComponentLink5Description=https://datasheet.ciiva.com/14848/m60-2p61-14848437.pdf?src-supplier=Digi-Key, ComponentLink5URL=https://datasheet.ciiva.com/14848/m60-2p61-14848437.pdf?src-supplier=Digi-Key, ComponentLink6Description=https://datasheet.ciiva.com/14848/m60-2p61-14848438.pdf?src-supplier=Digi-Key, ComponentLink6URL=https://datasheet.ciiva.com/14848/m60-2p61-14848438.pdf?src-supplier=Digi-Key, ComponentLink7Description=https://datasheet.ciiva.com/14848/m60-2p61-14848439.pdf?src-supplier=Digi-Key, ComponentLink7URL=https://datasheet.ciiva.com/14848/m60-2p61-14848439.pdf?src-supplier=Digi-Key, Contact Material=Bronze, Contact Plating=Silver, DatasheetVersion=03/2014, Height=0.09inch, Lead Free="Lead Free", Manufacturer Part Number 1=5019, Material=Bronze, Mount="Surface Mount", Mounting Technology="Surface Mount", Number of Pins=1, PackageDescription="1-Pin Surface Mount Device, Body 3.81 x 2.03 mm", PackageReference=5019, Packaging="Tape and Reel", Pins=1, Pricing 1="1=0.34000, 25=0.27360, 100=0.22340, 250=0.20064, 500=0.19152 (USD)", REACH SVHC="No SVHC", RoHS=Yes, RoHS Compliant=Yes, RoHSCompliant=True, Series=5019, Stock 1=1316816, Supplier 1=Digi-Key, Termination=SMD/SMT
U200 U201: library part CMP-04903-000082-1, "IC GATE AND 1CH 2-INP SOT23-5", Manufacturer 1="Texas Instruments", Supplier Part Number 1=296-SN74AHC1G08DBV3CT-ND, Category="Logic Gates", ComponentLink1Description=http://www.ti.com/general/docs/suppproductinfo.tsp?distId=10&amp;gotoUrl=http%3A%2F%2Fwww.ti.com%2Flit%2Fgpn%2Fsn74ahc1g08&src-supplier=Digi-Key, ComponentLink1URL=http://www.ti.com/general/docs/suppproductinfo.tsp?distId=10&amp;gotoUrl=http%3A%2F%2Fwww.ti.com%2Flit%2Fgpn%2Fsn74ahc1g08&src-supplier=Digi-Key, Logic Function="AND GATE", Manufacturer Part Number 1=SN74AHC1G08DBV3, Pricing 1="1=0.53000, 10=0.42800, 25=0.39200, 100=0.29170, 250=0.26436, 500=0.21878, 1000=0.16409 (USD)", RoHS=Yes, RoHS Compliant=Yes, Stock 1=11940, Supplier 1=Digi-Key
U300: library part CMP-0130-00043-1, "1.75Î¼A Micropower Voltage Detector, Push-Pull Output, 2.93V, 3-Pin SOT-23, Extended Temperature, Tape and Reel", Code_IPC=SOT23-3, DatasheetVersion="revD, Jun-2005", PackageDescription="3-Lead Plastic Small Outline Transistor (TT) [SOT-23]", PackageReference=SOT-23-TT3, PackageVersion="revBB, Aug-2009"
U301: library part CMP-0395-00499-2, "Single Output LDO, 1 A, Fixed 3.3 V Output, 2 to 5.5 V Input, 4-pin SOT-223 (DCY), -40 to 125 degC, Green (RoHS & no Sb/Br)", Manufacturer="Texas Instruments", Accuracy(%)=2, Code_JEDEC=TO-261, ComponentLink1Description="Manufacturer URL", ComponentLink1URL=http://www.ti.com/, ComponentLink2Description=Datasheet, ComponentLink2URL=http://www.ti.com/general/docs/lit/getliterature.tsp?genericPartNumber=TLV1117LV33&fileType=pdf, ComponentLink3Description="Package Specification", ComponentLink3URL=http://www.ti.com/litv/pdf/mpds094a, DatasheetVersion=SBVS160A, Eco-Plan="Green (RoHS & no Sb/Br)", Fixed Output Options(V)=3.3, Iout(Max)(A)=1, Iq(Typ)(mA)=0.05, Mounting Technology="Surface Mount", PackageDescription="4-Pin Plastic Small Outline, Body 3.5 x 6.5 mm, Pitch 2.3 mm", PackageReference=DCY0004A, PackageVersion=4202506/B, PartNumber=TLV1117LV33DCYT, SubFamily="Single Channel LDO", Vdo(Typ)(mV)=1200, Vin(Max)(V)=5.5, Vin(Min)(V)=2, Vout Adj(Max)(V)=3.3, Vout Adj(Min)(V)=3.3
U302: library part CMP-0138-00383-1, "Microcontroller Supervisory Circuit with Push-Pull Output, 3-Pin SOT-23, Industrial Temperature, Tape and Reel", Code_IPC=SOT23-3, DatasheetVersion="revC, 2001", PackageDescription="3-Lead Plastic Small Outline Transistor (TT) [SOT-23]", PackageReference=SOT-23-TT3, PackageVersion="revBB, Aug-2009"
U500: library part CMP-0248-00015-2, "USB to Full-Handshake UART Interface Chip, UHCI/OHCI/EHCI Compatible, USB 2.0 Compatible, -40 to +85 degC, 20-Pin SSOP, Pb-Free, Tube", Manufacturer=FTDI, Code_JEDEC=MO-137-AD, ComponentLink1Description="Manufacturer URL", ComponentLink1URL=http://www.ftdichip.com/, ComponentLink2Description=Datasheet, ComponentLink2URL=http://www.ftdichip.com/Support/Documents/DataSheets/ICs/DS_FT231X.pdf, ComponentLink3Description="FT231X Product Page", ComponentLink3URL=www.ftdichip.com/Products/ICs/FT231X.html, DatasheetVersion="ver 1.2, Feb-2013", PackageDescription="20-Pin Small Outline Package, 8.6 x 3.9 mm Body, 0.635 mm Pitch", PackageReference=SSOP-20, PackageVersion=Feb-13, PartNumber=FT231XS-U, RevisionNote="DatasheetVersion updated to 1.2 Feb-2013"
Y200: library part CMP-2000-07587-2, "CRYSTAL 32.7680KHZ 6PF SMD", Case/Package=SMD/SMT, ESR (Equivalent Series Resistance)=55kR, Frequency=32.768kHz, Frequency Tolerance=20ppm, Load Capacitance=6pF, Manufacturer 1=Abracon, Manufacturer Part Number 1=ABS07-120-32.768KHZ-T, Max Operating Temperature=85°C, Min Operating Temperature=-40°C, Operating Frequency="32.768 kHz", Package Quantity=3000, Series Resistance=60kR, Supplier Part Number 1=535-11937-1-ND, Category=Crystals, ComponentLink1Description=https://datasheet.ciiva.com/6728/abs07-120-32-768khz-t-6728893.pdf?src-supplier=Digi-Key, ComponentLink1URL=https://datasheet.ciiva.com/6728/abs07-120-32-768khz-t-6728893.pdf?src-supplier=Digi-Key, ComponentLink2Description=https://datasheet.ciiva.com/12387/abs07-120-32-768khz-t-218607-12387629.pdf?src-supplier=Mouser, ComponentLink2URL=https://datasheet.ciiva.com/12387/abs07-120-32-768khz-t-218607-12387629.pdf?src-supplier=Mouser, ComponentLink3Description=https://datasheet.ciiva.com/15214/getdatasheetpartid-722402-15214953.pdf?src-supplier=Verical, ComponentLink3URL=https://datasheet.ciiva.com/15214/getdatasheetpartid-722402-15214953.pdf?src-supplier=Verical, Depth=1.5mm, Height=0.035inch, Lead Free="Lead Free", Length=3.2mm, Mount="Surface Mount", Number of Pins=2, Packaging="Tape and Reel", Pricing 1="1=1.20000, 10=1.15000, 50=1.12340, 100=0.96290, 500=0.93616, 1000=0.78905 (USD)", Radiation Hardening=No, REACH SVHC="No SVHC", RoHS=Yes, RoHS Compliant=Yes, Series=ABS07, Stock 1=273340, Supplier 1=Digi-Key, Termination=SMD/SMT, Tolerance=20ppm, Width=0.061inch

## Nets (pads, with @x,y where several pads share a name; then routed paths per layer and width w, separated by ;. In a path a pad name is that pad's centre, name@x,y a point inside that pad or via, vN(x,y) a via of type N, cw(c..) or ccw(c..) an arc to the next point about the centre after c; other vN are vias at no path point)
3.3V: C200.1 C201.1 C302.1 C304.2 C400.1 C401.1 C402.2 C502.1 MD200.4 P200.1 R200.2 R201.2 R203.2 R204.2 R300.2 R400.1 TP301.1 TP400.1 U200.5 U201.5 U300.3 U301.2 U301.4 U500.3 U500.14
3V3_PWR_GOOD: LED300.2 R300.1 U200.1 U300.1
5V: C301.1 C303.1 C503.1 C504.1 FB300.1 TP300.1 TP500.1 U301.3 U302.3 U500.15
5V0_PWR_GOOD: LED301.2 U302.2
FTDI_CTS_N: R505.2 U500.9
FTDI_RTS_N: R504.2 U500.2
FTDI_RX: R503.2 U500.4
FTDI_TX: R502.2 U500.20
GND: C200.2 C201.2 C202.1 C203.1 C300.2 C301.2 C302.2 C303.2 C304.1 C400.2 C401.2 C500.2 C501.2 C502.2 C503.2 C504.2 J300.4 J300.5 J500.5 J500.Shell MD200.1 MD200.15 MD200.43 P200.2 R202.1 R301.1 R302.1 SW200.3 SW201.3 TP201.1 TP202.1 TP401.1 TP501.1 U200.3 U201.3 U300.2 U301.1 U302.1 U500.6 U500.16
INT_DIG: R405.2
NetC300_1: C300.1 FB300.2 J300.1
NetC402_1: C402.1
NetD400_2: R400.2
NetLED300_1: LED300.1 R301.2
NetLED301_1: LED301.1 R302.2